# EAGLE board blink1mk3-usbctest1 (EAGLE 9.0.1)

Size 8.94 x 13.54 mm. Coordinates in mm from the lower left corner, seen from the top.
Outline: 0,10 0,0 8.95,0 8.95,10 8.49,10 8.49,12.82 7.55,12.82 7.55,13.36 7.4,13.54 1.55,13.54 1.39,13.36 1.39,12.82 0.45,12.82 0.45,10 0,10
Copper layers (1*16): Top 0.035mm / dielectric 1.5mm / Bottom 0.035mm
Design rules "default": minimum track width 6mil, minimum drill 0.35mm, track to track 6mil, track to pad 6mil, pad to pad 6mil, via to via 6mil, smd to smd 6mil, copper to edge 40mil, drill to drill 6mil, minimum pad ring 10mil, minimum via ring 8mil, stop-mask expansion 4mil, vias tented up to drill 0mil, thermal gap 10mil

## Footprints (pad centres in the part's own frame; a part is rotated, then mirrored left to right if it is on the bottom)
R0603 = smd 1 x 1.1: 1 -0.85,0; 2 0.85,0

## Placement (x,y rotation side)
R1  [R0603]  3.81,3.81 0 top

## Library data of the parts
R1 = resistor